# EAGLE board Phineas-PCB (EAGLE 9.6.1)
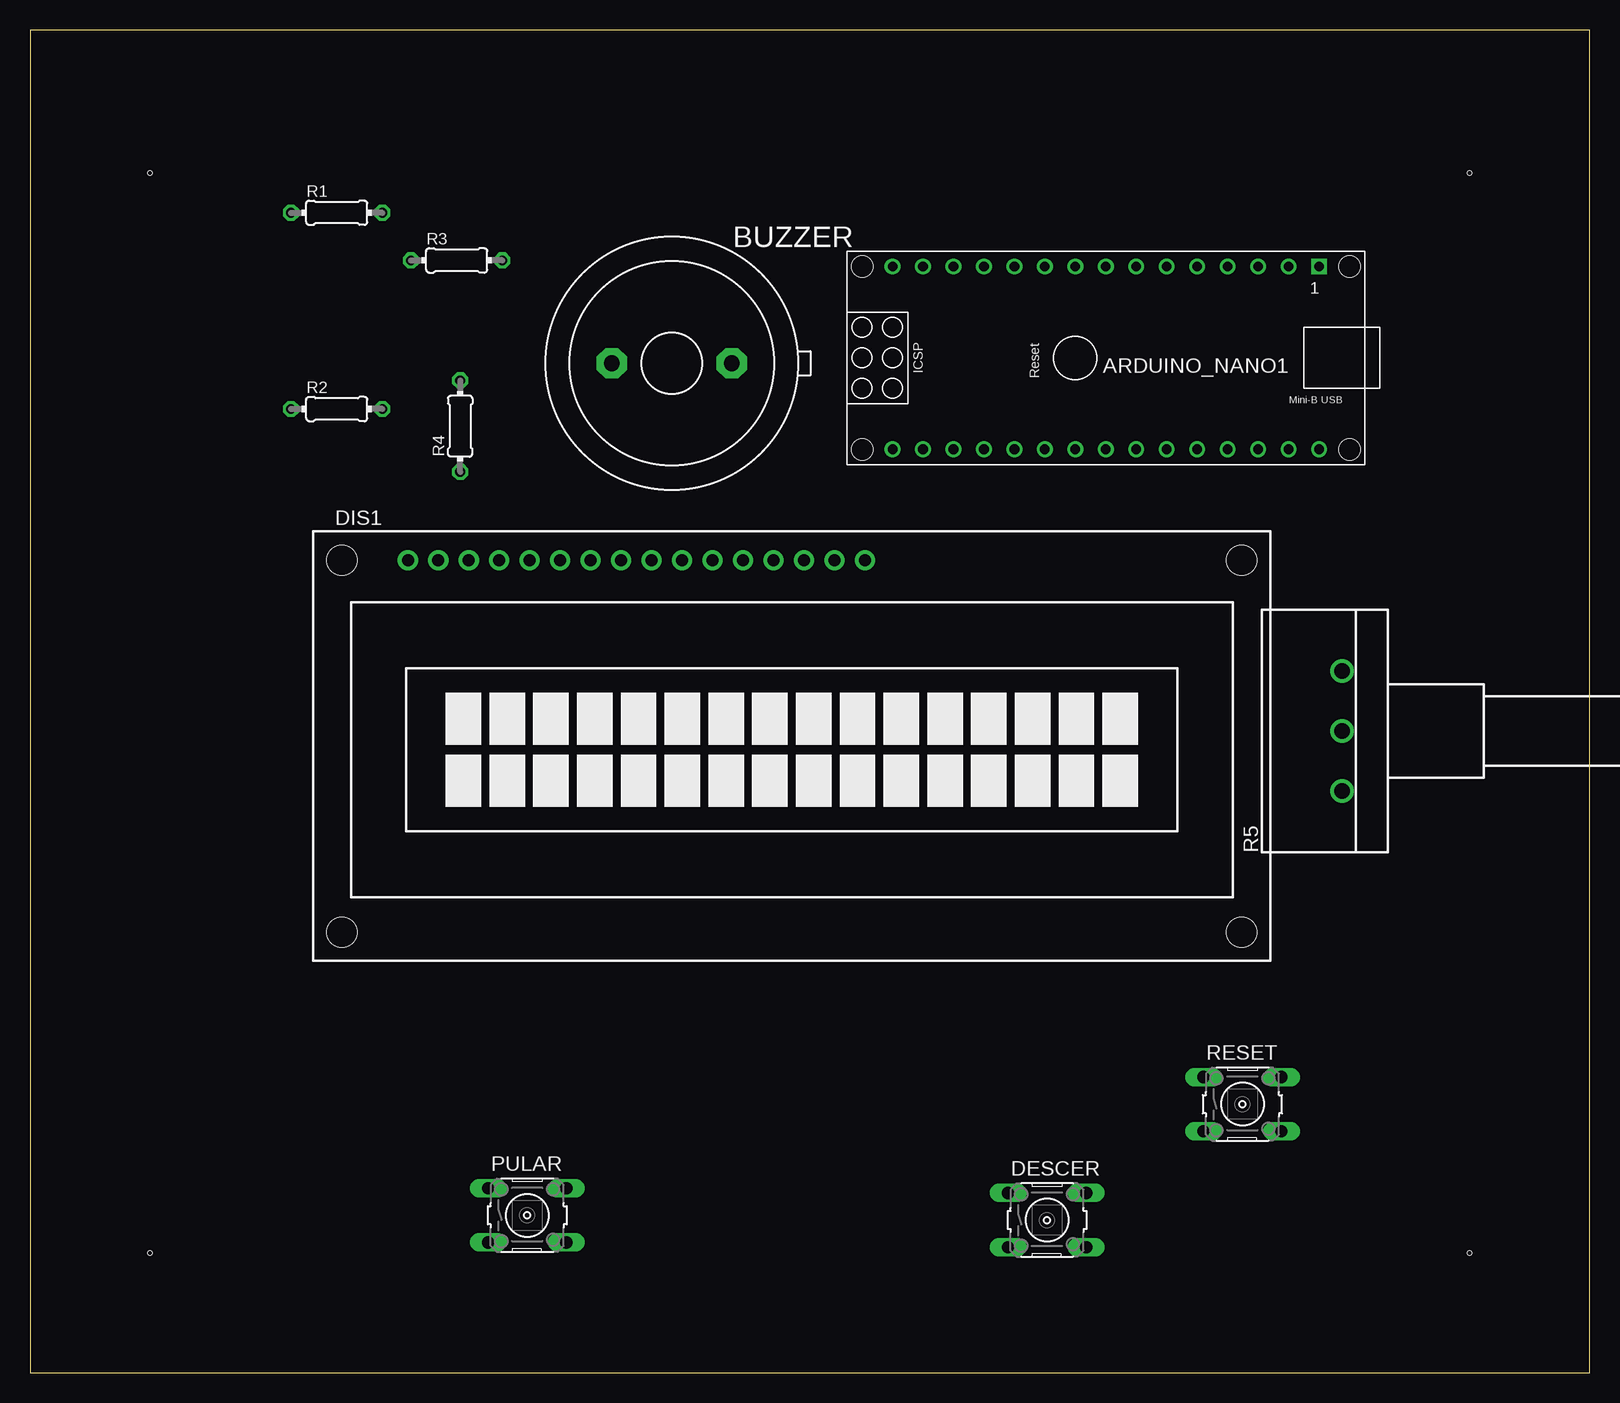
[diagram p0: board, top side]
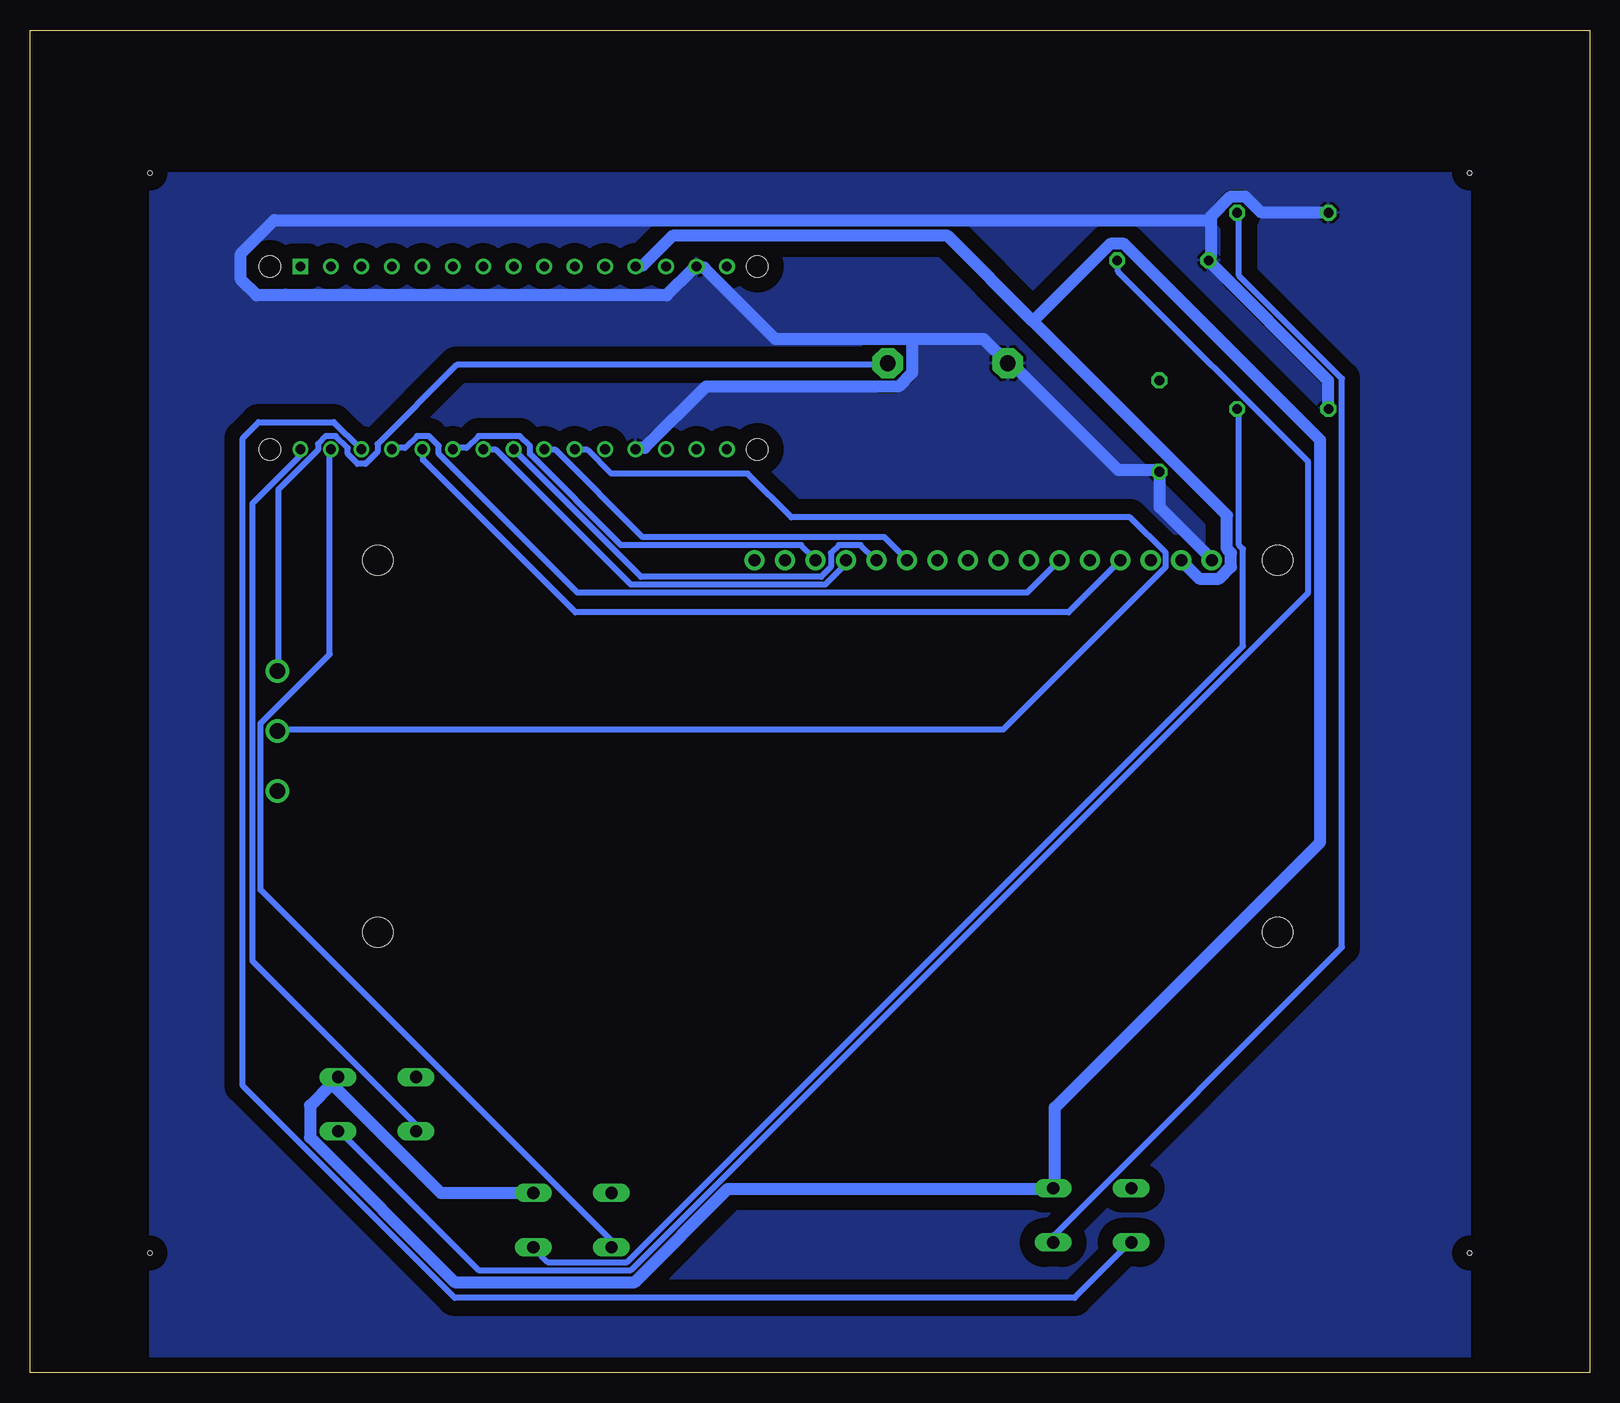
[diagram p1: board, bottom side, seen from below]

Size 130 x 111.91 mm. Coordinates in mm from the lower left corner, seen from the top.
Outline: 0,0 130,0 130,111.91 0,111.91 0,0
Copper layers (1*16): Top 0.035mm / dielectric 1.5mm / Bottom 0.035mm
Design rules "default": minimum track width 6mil, minimum drill 0.35mm, track to track 6mil, track to pad 6mil, pad to pad 6mil, via to via 6mil, smd to smd 6mil, copper to edge 40mil, drill to drill 6mil, minimum pad ring 10mil, minimum via ring 8mil, stop-mask expansion 4mil, vias tented up to drill 0mil, thermal gap 10mil
Net classes: 0 default: width 0.508 mm; 1 alimentacao: width 1.016 mm
Holes 0.35 mm at 10,100 120,100 10,10 120,10

## Footprints (pad centres in the part's own frame; a part is rotated, then mirrored left to right if it is on the bottom)
ARDUINO_NANO = drill 0.8 square: 1 -20.32,-7.62 | drill 0.8: 2 -17.78,-7.62; 3 -15.24,-7.62; 4 -12.7,-7.62; 5 -10.16,-7.62; 6 -7.62,-7.62; 7 -5.08,-7.62; 8 -2.54,-7.62; 9 0,-7.62; 10 2.54,-7.62; 11 5.08,-7.62; 12 7.62,-7.62; 13 10.16,-7.62; 14 12.7,-7.62; 15 15.24,-7.62; 16 15.24,7.62; 17 12.7,7.62; 18 10.16,7.62; 19 7.62,7.62; 20 5.08,7.62; 21 2.54,7.62; 22 0,7.62; 23 -2.54,7.62; 24 -5.08,7.62; 25 -7.62,7.62; 26 -10.16,7.62; 27 -12.7,7.62; 28 -15.24,7.62; 29 -17.78,7.62; 30 -20.32,7.62 | hole 1.778: -22.86,-7.62; -22.86,7.62; 17.78,7.62; 17.78,-7.62
F/EE21P = drill 1.321 pad 2.54 octagon: 1 -5.004,0; 2 5.004,0
B3F-10XX = drill 1.016 long: 1 -3.251,2.261; 2 3.251,2.261; 3 -3.251,-2.261; 4 3.251,-2.261
TUXGR_16X2_R2 = drill 1 pad 1.676: 1 -32,15.5; 2 -29.46,15.5; 3 -26.92,15.5; 4 -24.38,15.5; 5 -21.84,15.5; 6 -19.3,15.5; 7 -16.76,15.5; 8 -14.22,15.5; 9 -11.68,15.5; 10 -9.14,15.5; 11 -6.6,15.5; 12 -4.06,15.5; 13 -1.52,15.5; 14 1.02,15.5; 15 3.56,15.5; 16 6.1,15.5 | hole 2.5: -37.5,-15.5; 37.5,-15.5; -37.5,15.5; 37.5,15.5
0204/7 = drill 0.813 octagon: 1 -3.81,0; 2 3.81,0
CIP20C-6MM = drill 1.3 pad 1.93: A -5,0; E 5,0; S 0,0

## Placement (x,y rotation side)
ARDUINO_NANO1  [ARDUINO_NANO]  87.14,84.59 180 top
BUZZER  F/EE21P  [F/EE21P]  53.5,84.14 0 top
DESCER  [B3F-10XX]  84.78,12.74 0 top
DIS1  TUXGR_16X2_R2  [TUXGR_16X2_R2]  63.5,52.23 0 top
PULAR  [B3F-10XX]  41.45,13.14 0 top
R1  [0204/7]  25.57,96.68 0 top
R2  [0204/7]  25.57,80.33 0 top
R3  [0204/7]  35.57,92.71 0 top
R4  [0204/7]  35.86,78.9 90 top
R5  [CIP20C-6MM]  109.38,53.5 90 top
RESET  [B3F-10XX]  101.07,22.4 0 top

## Library data of the parts
ARDUINO_NANO1 = ArduinoNanoV30
BUZZER = buzzer; OC_FARNELL: unknown; OC_NEWARK: unknown
DESCER PULAR RESET = switch-omron; MPN: B3F-1000; OC_FARNELL: 176432; OC_NEWARK: 36M3542
DIS1 = display-lcd; OC_FARNELL: unknown; OC_NEWARK: unknown
R1-R4 = rcl; SPICEPREFIX: R
R5 = pot

## Nets
GND [alimentacao]: ARDUINO_NANO1.14 ARDUINO_NANO1.19 BUZZER.1 DIS1.1 R1.1 R2.1 R3.1 R4.1
N$2: PULAR.4 R1.2
N$3: DESCER.4 R2.2
N$4: R3.2 RESET.4
N$5: ARDUINO_NANO1.26 DIS1.4
N$6: ARDUINO_NANO1.30 RESET.3
N$7: ARDUINO_NANO1.29 DESCER.3
N$8: ARDUINO_NANO1.28 PULAR.3
N$9: ARDUINO_NANO1.27 DIS1.6
N$11: ARDUINO_NANO1.25 DIS1.14
N$12: ARDUINO_NANO1.24 DIS1.13
N$13: ARDUINO_NANO1.23 DIS1.12
N$14: ARDUINO_NANO1.22 DIS1.11
N$16: BUZZER.2 R5.E
N$18: ARDUINO_NANO1.21 R5.S
VCC [alimentacao]: ARDUINO_NANO1.12 DESCER.2 DIS1.2 PULAR.2 RESET.2
VIN [alimentacao]: ARDUINO_NANO1.15

## Tracks (layer width: path | path; a pad name or v marks a point on that pad's centre or on a via)
GND
  Bottom 1.016: R2.1 21.79,80.38 21.79,82.69 31.7,92.6 R3.1 31.53,93.09 31.53,96.06 | 31.53,96.06 31.53,96.39 29.88,98.05 28.73,98.05 27.41,96.73 21.79,96.73 R1.1 | DIS1.1 31.53,67.83 35.83,72.13 35.83,74.93 R4.1 36.32,75.26 39.29,75.26 48.04,84.01 BUZZER.1 48.54,84.18 50.52,86.16 56.46,86.16 | 56.46,86.16 67.86,86.16 73.8,92.1 74.3,92.1 ARDUINO_NANO1.14 74.79,91.94 76.94,89.79 111.11,89.79 112.43,91.11 112.43,93.26 109.63,96.06 31.53,96.06 | 56.46,86.16 56.46,83.35 57.62,82.2 73.64,82.2 78.75,77.08 79.41,77.08 ARDUINO_NANO1.19
  pour Bottom (isolate 1.27): 10,100 10,0 120,0 120,100
N$2
  Bottom 0.508: R1.2 29.22,96.56 29.22,91.44 20.64,82.86 20.64,35.47 44.58,11.53 44.58,11.04 PULAR.4
N$3
  Bottom 0.508: R2.2 29.22,80.22 29.22,68.99 28.89,68.66 28.89,60.57 80.24,9.22 86.84,9.22 88,10.38 DESCER.4
N$4
  Bottom 0.508: R3.2 39.29,92.6 39.29,91.77 23.44,75.92 23.44,65.03 79.91,8.56 92.62,8.56 104.18,20.12 RESET.4
N$5
  Bottom 0.508: ARDUINO_NANO1.26 97.24,76.91 97.24,76.09 84.53,63.38 43.42,63.38 39.13,67.67 DIS1.4
N$6
  Bottom 0.508: ARDUINO_NANO1.30 107.48,76.91 107.48,76.42 111.44,72.46 111.44,34.32 97.9,20.78 97.9,20.28 RESET.3
N$7
  Bottom 0.508: ARDUINO_NANO1.29 105,76.91 105,59.91 110.78,54.13 110.78,40.26 81.56,11.04 81.56,10.54 DESCER.3
N$8
  Bottom 0.508: ARDUINO_NANO1.28 102.53,77.08 104.67,79.22 110.95,79.22 112.27,77.9 112.27,23.92 94.6,6.25 42.93,6.25 38.3,10.87 PULAR.3
N$9
  Bottom 0.508: ARDUINO_NANO1.27 99.72,77.08 98.73,77.08 97.74,78.07 96.75,78.07 95.92,77.24 95.92,76.58 84.37,65.03 46.89,65.03 44.25,67.67 DIS1.6
N$11
  Bottom 0.508: ARDUINO_NANO1.25 94.6,77.08 93.61,77.08 92.62,78.07 89.15,78.07 88.33,77.24 88.33,76.58 80.73,68.99 65.71,68.99 64.55,67.83 DIS1.14
N$12
  Bottom 0.508: ARDUINO_NANO1.24 92.13,76.91 91.14,76.91 79.91,65.69 63.73,65.69 62.08,67.34 62.08,67.67 DIS1.13
N$13
  Bottom 0.508: ARDUINO_NANO1.23 89.65,76.91 79.08,66.35 64.06,66.35 63.23,67.17 63.23,68.33 62.57,68.99 60.76,68.99 59.6,67.83 DIS1.12
N$14
  Bottom 0.508: ARDUINO_NANO1.22 87.01,76.91 86.18,76.91 78.92,69.65 58.78,69.65 56.96,67.83 DIS1.11
N$16
  Bottom 0.508: R5.E 109.3,58.59 109.3,73.61 105.99,76.91 105.99,77.41 105.33,78.07 104.51,78.07 103.52,77.08 103.52,76.58 102.69,75.76 102.03,75.76 101.04,76.75 101.04,77.41 94.44,84.01 58.61,84.01 BUZZER.2
N$18
  Bottom 0.508: ARDUINO_NANO1.21 84.53,76.91 83.54,76.91 81.56,74.93 70.17,74.93 66.53,71.3 38.3,71.3 35.33,68.33 35.33,67.17 48.87,53.64 109.3,53.64 R5.S
VCC
  Bottom 1.016: 46.39,87.64 30.21,71.47 30.21,68.66 29.88,68.33 29.88,67.17 30.87,66.18 32.52,66.18 34.01,67.67 DIS1.2 | 46.39,87.64 53.49,94.75 76.44,94.75 78.92,92.27 79.41,92.27 ARDUINO_NANO1.12 | 104.84,24.08 104.34,24.58 RESET.2 | 104.84,24.08 106.66,22.27 106.66,19.62 94.6,7.57 79.58,7.57 71.82,15.33 44.74,15.33 PULAR.2 44.58,15.83 44.58,22.1 22.45,44.22 22.45,77.74 38.8,94.08 39.95,94.08 46.39,87.64 | 104.84,24.08 95.76,15 88.16,15 DESCER.2